# EAGLE board GrapherBlank (EAGLE 5.10)
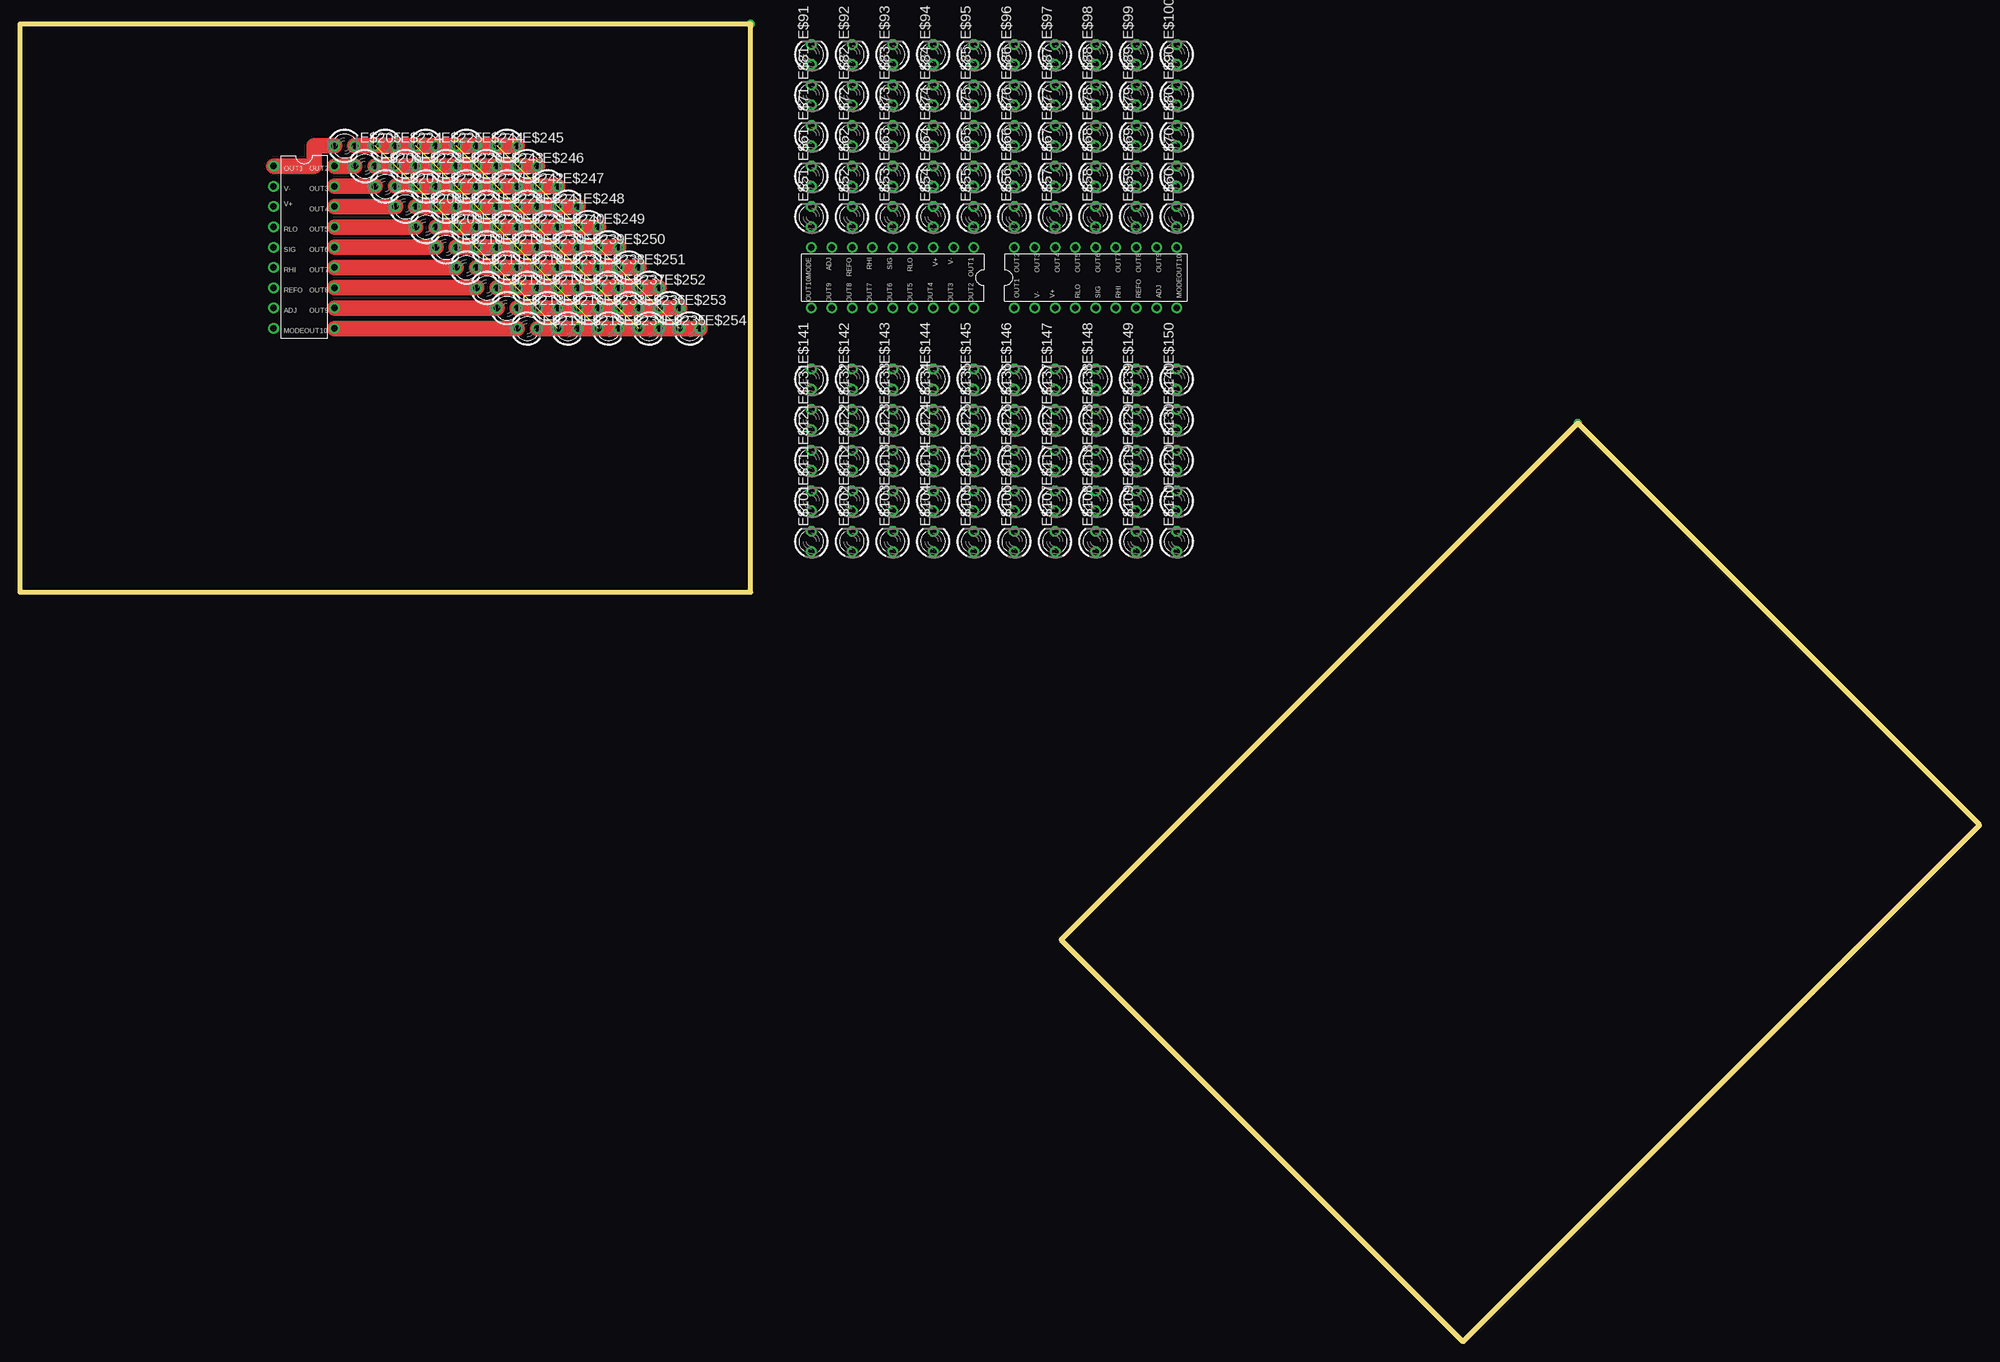
[diagram p0: board, top side]

Size 245.24 x 164.92 mm. Coordinates in mm from the lower left corner, seen from the top.
Outline: 91.44,93.8 91.44,164.92 0,164.92 0,93.8 91.44,93.8
Outline: 245.24,64.66 194.95,114.95 130.29,50.29 180.58,0 245.24,64.66
Copper layers (1*16): Top 0.035mm / dielectric 1.5mm / Bottom 0.035mm
Design rules "default": minimum track width 10mil, minimum drill 24mil, track to track 8mil, track to pad 8mil, pad to pad 8mil, via to via 8mil, smd to smd 8mil, copper to edge 40mil, drill to drill 8mil, minimum pad ring 10mil, minimum via ring 8mil, stop-mask expansion 4mil, vias tented up to drill 0mil, thermal gap 10mil

## Footprints (pad centres in the part's own frame; a part is rotated, then mirrored left to right if it is on the bottom)
LED3MM = drill 0.813 octagon: A -1.27,0; K 1.27,0
LM3914-10LED-BARGRAPH = drill 0.813 round: 1!R -3.81,1.27; 1!S -3.81,3.81; 1Q 3.81,1.27; 2!R -3.81,-3.81; 2!S -3.81,-6.35; 2Q 3.81,-8.89; 2Q1 3.81,-11.43; 2Q3 -3.81,-11.43; 3!R 3.81,-1.27; 3!S 3.81,-3.81; 3Q 3.81,-6.35; 4!R 3.81,3.81; 4!S 3.81,6.35; 4Q -3.81,8.89; GND -3.81,-8.89; NC -3.81,6.35; OE -3.81,-1.27; VCC 3.81,8.89

## Placement (x,y rotation side)
E$51  [LED3MM]  99.06,140.79 90 top
E$52  [LED3MM]  104.14,140.79 90 top
E$53  [LED3MM]  109.22,140.79 90 top
E$54  [LED3MM]  114.3,140.79 90 top
E$55  [LED3MM]  119.38,140.79 90 top
E$56  [LED3MM]  124.46,140.79 90 top
E$57  [LED3MM]  129.54,140.79 90 top
E$58  [LED3MM]  134.62,140.79 90 top
E$59  [LED3MM]  139.7,140.79 90 top
E$60  [LED3MM]  144.78,140.79 90 top
E$61  [LED3MM]  99.06,145.87 90 top
E$62  [LED3MM]  104.14,145.87 90 top
E$63  [LED3MM]  109.22,145.87 90 top
E$64  [LED3MM]  114.3,145.87 90 top
E$65  [LED3MM]  119.38,145.87 90 top
E$66  [LED3MM]  124.46,145.87 90 top
E$67  [LED3MM]  129.54,145.87 90 top
E$68  [LED3MM]  134.62,145.87 90 top
E$69  [LED3MM]  139.7,145.87 90 top
E$70  [LED3MM]  144.78,145.87 90 top
E$71  [LED3MM]  99.06,150.95 90 top
E$72  [LED3MM]  104.14,150.95 90 top
E$73  [LED3MM]  109.22,150.95 90 top
E$74  [LED3MM]  114.3,150.95 90 top
E$75  [LED3MM]  119.38,150.95 90 top
E$76  [LED3MM]  124.46,150.95 90 top
E$77  [LED3MM]  129.54,150.95 90 top
E$78  [LED3MM]  134.62,150.95 90 top
E$79  [LED3MM]  139.7,150.95 90 top
E$80  [LED3MM]  144.78,150.95 90 top
E$81  [LED3MM]  99.06,156.03 90 top
E$82  [LED3MM]  104.14,156.03 90 top
E$83  [LED3MM]  109.22,156.03 90 top
E$84  [LED3MM]  114.3,156.03 90 top
E$85  [LED3MM]  119.38,156.03 90 top
E$86  [LED3MM]  124.46,156.03 90 top
E$87  [LED3MM]  129.54,156.03 90 top
E$88  [LED3MM]  134.62,156.03 90 top
E$89  [LED3MM]  139.7,156.03 90 top
E$90  [LED3MM]  144.78,156.03 90 top
E$91  [LED3MM]  99.06,161.11 90 top
E$92  [LED3MM]  104.14,161.11 90 top
E$93  [LED3MM]  109.22,161.11 90 top
E$94  [LED3MM]  114.3,161.11 90 top
E$95  [LED3MM]  119.38,161.11 90 top
E$96  [LED3MM]  124.46,161.11 90 top
E$97  [LED3MM]  129.54,161.11 90 top
E$98  [LED3MM]  134.62,161.11 90 top
E$99  [LED3MM]  139.7,161.11 90 top
E$100  [LED3MM]  144.78,161.11 90 top
E$101  [LED3MM]  99.06,100.15 90 top
E$102  [LED3MM]  104.14,100.15 90 top
E$103  [LED3MM]  109.22,100.15 90 top
E$104  [LED3MM]  114.3,100.15 90 top
E$105  [LED3MM]  119.38,100.15 90 top
E$106  [LED3MM]  124.46,100.15 90 top
E$107  [LED3MM]  129.54,100.15 90 top
E$108  [LED3MM]  134.62,100.15 90 top
E$109  [LED3MM]  139.7,100.15 90 top
E$110  [LED3MM]  144.78,100.15 90 top
E$111  [LED3MM]  99.06,105.23 90 top
E$112  [LED3MM]  104.14,105.23 90 top
E$113  [LED3MM]  109.22,105.23 90 top
E$114  [LED3MM]  114.3,105.23 90 top
E$115  [LED3MM]  119.38,105.23 90 top
E$116  [LED3MM]  124.46,105.23 90 top
E$117  [LED3MM]  129.54,105.23 90 top
E$118  [LED3MM]  134.62,105.23 90 top
E$119  [LED3MM]  139.7,105.23 90 top
E$120  [LED3MM]  144.78,105.23 90 top
E$121  [LED3MM]  99.06,110.31 90 top
E$122  [LED3MM]  104.14,110.31 90 top
E$123  [LED3MM]  109.22,110.31 90 top
E$124  [LED3MM]  114.3,110.31 90 top
E$125  [LED3MM]  119.38,110.31 90 top
E$126  [LED3MM]  124.46,110.31 90 top
E$127  [LED3MM]  129.54,110.31 90 top
E$128  [LED3MM]  134.62,110.31 90 top
E$129  [LED3MM]  139.7,110.31 90 top
E$130  [LED3MM]  144.78,110.31 90 top
E$131  [LED3MM]  99.06,115.39 90 top
E$132  [LED3MM]  104.14,115.39 90 top
E$133  [LED3MM]  109.22,115.39 90 top
E$134  [LED3MM]  114.3,115.39 90 top
E$135  [LED3MM]  119.38,115.39 90 top
E$136  [LED3MM]  124.46,115.39 90 top
E$137  [LED3MM]  129.54,115.39 90 top
E$138  [LED3MM]  134.62,115.39 90 top
E$139  [LED3MM]  139.7,115.39 90 top
E$140  [LED3MM]  144.78,115.39 90 top
E$141  [LED3MM]  99.06,120.47 90 top
E$142  [LED3MM]  104.14,120.47 90 top
E$143  [LED3MM]  109.22,120.47 90 top
E$144  [LED3MM]  114.3,120.47 90 top
E$145  [LED3MM]  119.38,120.47 90 top
E$146  [LED3MM]  124.46,120.47 90 top
E$147  [LED3MM]  129.54,120.47 90 top
E$148  [LED3MM]  134.62,120.47 90 top
E$149  [LED3MM]  139.7,120.47 90 top
E$150  [LED3MM]  144.78,120.47 90 top
E$151  [LM3914-10LED-BARGRAPH]  133.35,133.17 90 top
E$152  [LM3914-10LED-BARGRAPH]  110.49,133.17 270 top
E$153  [LM3914-10LED-BARGRAPH]  35.56,138.25 0 top
E$205  [LED3MM]  40.64,149.68 0 top
E$206  [LED3MM]  43.18,147.14 0 top
E$207  [LED3MM]  45.72,144.6 0 top
E$208  [LED3MM]  48.26,142.06 0 top
E$209  [LED3MM]  50.8,139.52 0 top
E$210  [LED3MM]  53.34,136.98 0 top
E$211  [LED3MM]  55.88,134.44 0 top
E$212  [LED3MM]  58.42,131.9 0 top
E$213  [LED3MM]  60.96,129.36 0 top
E$214  [LED3MM]  63.5,126.82 0 top
E$215  [LED3MM]  68.58,126.82 0 top
E$216  [LED3MM]  66.04,129.36 0 top
E$217  [LED3MM]  63.5,131.9 0 top
E$218  [LED3MM]  60.96,134.44 0 top
E$219  [LED3MM]  58.42,136.98 0 top
E$220  [LED3MM]  55.88,139.52 0 top
E$221  [LED3MM]  53.34,142.06 0 top
E$222  [LED3MM]  50.8,144.6 0 top
E$223  [LED3MM]  48.26,147.14 0 top
E$224  [LED3MM]  45.72,149.68 0 top
E$225  [LED3MM]  50.8,149.68 0 top
E$226  [LED3MM]  53.34,147.14 0 top
E$227  [LED3MM]  55.88,144.6 0 top
E$228  [LED3MM]  58.42,142.06 0 top
E$229  [LED3MM]  60.96,139.52 0 top
E$230  [LED3MM]  63.5,136.98 0 top
E$231  [LED3MM]  66.04,134.44 0 top
E$232  [LED3MM]  68.58,131.9 0 top
E$233  [LED3MM]  71.12,129.36 0 top
E$234  [LED3MM]  73.66,126.82 0 top
E$235  [LED3MM]  78.74,126.82 0 top
E$236  [LED3MM]  76.2,129.36 0 top
E$237  [LED3MM]  73.66,131.9 0 top
E$238  [LED3MM]  71.12,134.44 0 top
E$239  [LED3MM]  68.58,136.98 0 top
E$240  [LED3MM]  66.04,139.52 0 top
E$241  [LED3MM]  63.5,142.06 0 top
E$242  [LED3MM]  60.96,144.6 0 top
E$243  [LED3MM]  58.42,147.14 0 top
E$244  [LED3MM]  55.88,149.68 0 top
E$245  [LED3MM]  60.96,149.68 0 top
E$246  [LED3MM]  63.5,147.14 0 top
E$247  [LED3MM]  66.04,144.6 0 top
E$248  [LED3MM]  68.58,142.06 0 top
E$249  [LED3MM]  71.12,139.52 0 top
E$250  [LED3MM]  73.66,136.98 0 top
E$251  [LED3MM]  76.2,134.44 0 top
E$252  [LED3MM]  78.74,131.9 0 top
E$253  [LED3MM]  81.28,129.36 0 top
E$254  [LED3MM]  83.82,126.82 0 top

## Library data of the parts
E$51-E$150 E$205-E$254 = led
E$151-E$153 = RussellLibrary

## Nets
S$1: E$153.VCC E$206.A
S$2: E$153.4Q E$205.A
S$3: E$213.K E$216.K E$233.K E$236.K E$253.K
S$4: E$214.K E$254.K
S$5: E$212.K E$252.K
S$6: E$153.4!S E$207.A
S$7: E$153.4!R E$208.A
S$8: E$153.1Q E$209.A
S$9: E$153.3!R E$210.A
S$10: E$153.2Q1 E$214.A
S$11: E$153.2Q E$213.A
S$12: E$153.3Q E$212.A
S$13: E$153.3!S E$211.A
S$20: E$211.K E$251.K
S$21: E$210.K E$250.K
S$29: E$209.K E$249.K
S$30: E$208.K E$248.K
S$31: E$207.K E$247.K
S$32: E$206.K E$246.K
S$33: E$205.K E$245.K
S$34: E$245.A E$254.A
S$35: E$235.A E$244.A
S$36: E$225.A E$234.A
S$42: E$215.A E$224.A

## Tracks (layer width: path | path; a pad name or v marks a point on that pad's centre or on a via)
S$1
  Top 1.93: E$153.VCC E$206.A
S$2
  Top 1.93: E$205.A 36.83,149.68 36.83,147.14 E$153.4Q
S$3
  Top 1.93: E$213.K E$216.K E$233.K E$236.K E$253.K
S$4
  Top 1.93: E$214.K E$254.K
S$5
  Top 1.93: E$212.K E$252.K
S$6
  Top 1.93: E$153.4!S E$207.A
S$7
  Top 1.93: E$153.4!R E$208.A
S$8
  Top 1.93: E$153.1Q E$209.A
S$9
  Top 1.93: E$153.3!R E$210.A
S$10
  Top 1.93: E$153.2Q1 E$214.A
S$11
  Top 1.93: E$153.2Q E$213.A
S$12
  Top 1.93: E$153.3Q E$212.A
S$13
  Top 1.93: E$153.3!S E$211.A
S$14  (via drill 0.6)
  other vias: 194.95,114.95
S$20
  Top 1.93: E$211.K E$251.K
S$21
  Top 1.93: E$210.K E$250.K
S$25  (via drill 0.6)
  other vias: 91.44,164.92
S$29
  Top 1.93: E$209.K E$249.K
S$30
  Top 1.93: E$208.K E$248.K
S$31
  Top 1.93: E$207.K E$247.K
S$32
  Top 1.93: E$206.K E$246.K
S$33
  Top 1.93: E$205.K E$245.K
S$34  (1 unrouted)
S$35  (1 unrouted)
S$36  (1 unrouted)
S$42  (1 unrouted)